# EAGLE board PCB2 (EAGLE 9.5.2)
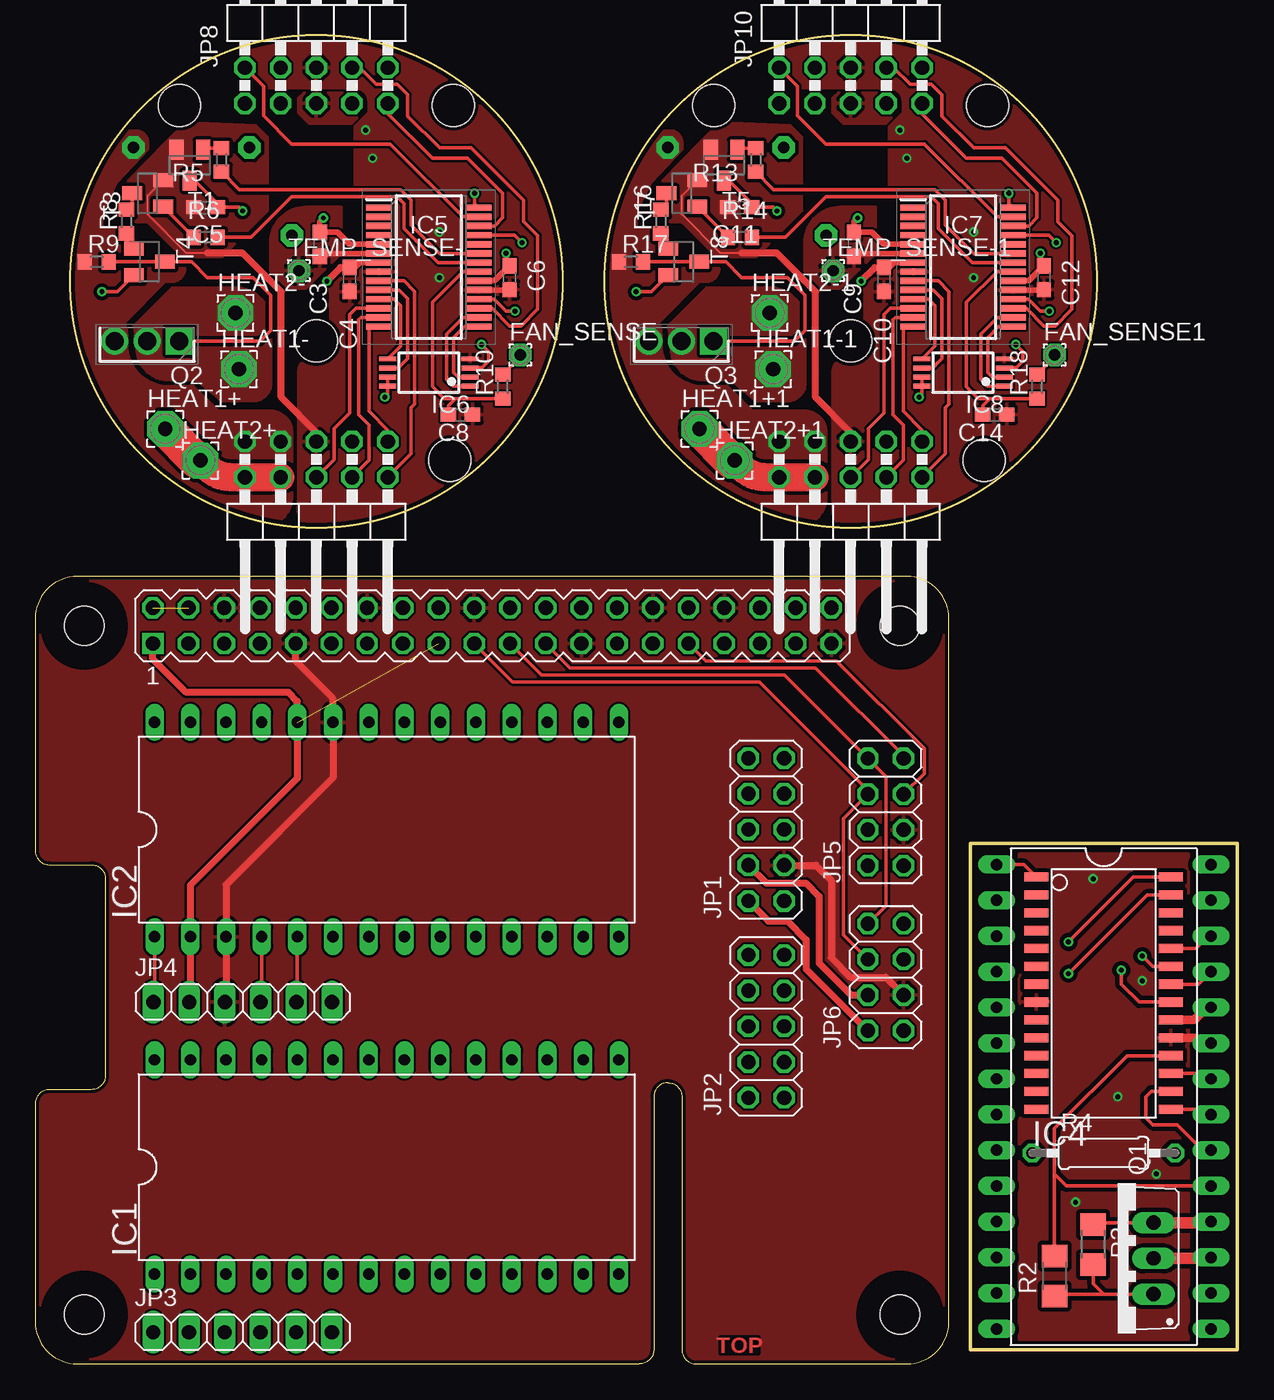
[diagram p0: board, top side]
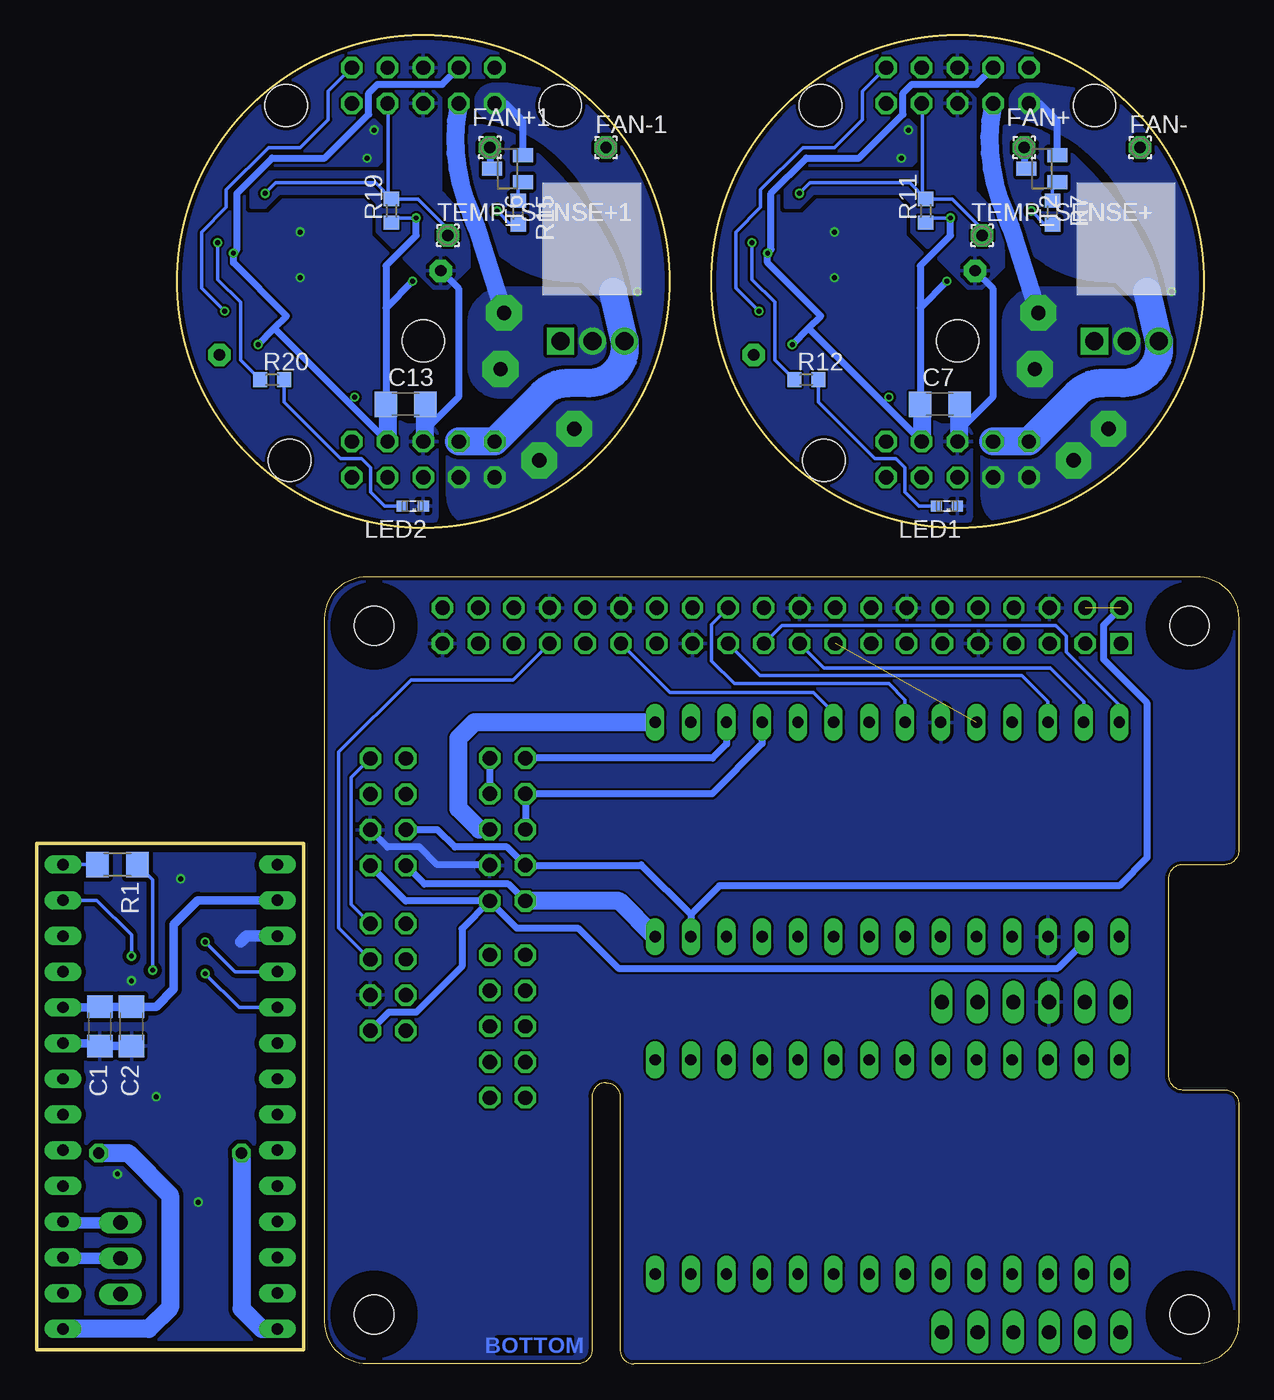
[diagram p1: board, bottom side, seen from below]

Size 85.5 x 94.5 mm. Coordinates in mm from the lower left corner, seen from the top.
Outline: 0,3 arc90 3,0 43,0 arc90 44,1 44,19 arc-90 45,20 arc-90 46,19 46,1 arc90 47,0 62,0 arc90 65,3 65,53 arc90 62,56 3,56 arc90 0,53 0,36.5 arc90 1,35.5 4,35.5 arc-90 5,34.5 5,20.5 arc-90 4,19.5 1,19.5 arc90 0,18.5 0,3
Outline: 85.5,37 66.5,37 66.5,1 85.5,1 85.5,37
Outline: circle at 20,77 radius 17.5
Outline: circle at 58,77 radius 17.5
Copper layers (1*16): Top 0.035mm / dielectric 1.5mm / Bottom 0.035mm
Design rules "ITEADstudio_DRC": minimum track width 6mil, minimum drill 12mil, track to track 6mil, track to pad 6mil, pad to pad 6mil, via to via 6mil, smd to smd 0mil, copper to edge 10mil, drill to drill 10mil, minimum pad ring 10mil, minimum via ring 6mil, stop-mask expansion 2mil, vias tented up to drill 100mil, thermal gap 10mil
Holes 2.8 mm at 3.5,3.5 3.5,52.5 61.5,52.5 61.5,3.5
Holes 3 mm at 20,72.75 10.25,89.5 29.75,89.5 29.5,64.25 58,72.75 48.25,89.5 67.75,89.5 67.5,64.25
tRestrict: area 1.9,51 to 5,54; area 60,51 to 63,54; area 60,1.9 to 63,5; area 1.9,1.9 to 5,5
bRestrict: area 1.9,1.9 to 5,5; area 1.9,51 to 5,54; area 60,1.9 to 63,5; area 60,51 to 63,54

## Footprints (pad centres in the part's own frame; a part is rotated, then mirrored left to right if it is on the bottom)
C1206 = smd 1.6 x 1.8: 1 -1.4,0; 2 1.4,0
C0603 = smd 1.1 x 1: 1 -0.85,0; 2 0.85,0
1,6/0,8 = drill 0.813 pad 1.6 octagon: 1 0,0
2,54/1,0 = drill 1.016 pad 2.54 octagon: 1 0,0
DIL28-6 = drill 0.813 long: 1 -16.51,-7.62; 2 -13.97,-7.62; 3 -11.43,-7.62; 4 -8.89,-7.62; 5 -6.35,-7.62; 6 -3.81,-7.62; 7 -1.27,-7.62; 8 1.27,-7.62; 9 3.81,-7.62; 10 6.35,-7.62; 11 8.89,-7.62; 12 11.43,-7.62; 13 13.97,-7.62; 14 16.51,-7.62; 15 16.51,7.62; 16 13.97,7.62; 17 11.43,7.62; 18 8.89,7.62; 19 6.35,7.62; 20 3.81,7.62; 21 1.27,7.62; 22 -1.27,7.62; 23 -3.81,7.62; 24 -6.35,7.62; 25 -8.89,7.62; 26 -11.43,7.62; 27 -13.97,7.62; 28 -16.51,7.62
SO28W = smd 0.65 x 1.7: 1 -7.62,-4.78; 2 -6.35,-4.78; 3 -5.08,-4.78; 4 -3.81,-4.78; 5 -2.54,-4.78; 6 -1.27,-4.78; 7 0,-4.78; 8 1.27,-4.78; 9 2.54,-4.78; 10 3.81,-4.78; 11 5.08,-4.78; 12 6.35,-4.78; 13 7.62,-4.78; 14 8.89,-4.78; 15 8.89,4.78; 16 7.62,4.78; 17 6.35,4.78; 18 5.08,4.78; 19 3.81,4.78; 20 2.54,4.78; 21 1.27,4.78; 22 0,4.78; 23 -1.27,4.78; 24 -2.54,4.78; 25 -3.81,4.78; 26 -5.08,4.78; 27 -6.35,4.78; 28 -7.62,4.78
SOP65P780X200-28N = smd 1.8 x 0.45: 1 -3.55,4.225; 2 -3.55,3.575; 3 -3.55,2.925; 4 -3.55,2.275; 5 -3.55,1.625; 6 -3.55,0.975; 7 -3.55,0.325; 8 -3.55,-0.325; 9 -3.55,-0.975; 10 -3.55,-1.625; 11 -3.55,-2.275; 12 -3.55,-2.925; 13 -3.55,-3.575; 14 -3.55,-4.225; 15 3.55,-4.225; 16 3.55,-3.575; 17 3.55,-2.925; 18 3.55,-2.275; 19 3.55,-1.625; 20 3.55,-0.975; 21 3.55,-0.325; 22 3.55,0.325; 23 3.55,0.975; 24 3.55,1.625; 25 3.55,2.275; 26 3.55,2.925; 27 3.55,3.575; 28 3.55,4.225
TSSOP8 = smd 0.35 x 1.2: 1 -0.975,-2.925; 2 -0.325,-2.925; 3 0.325,-2.925; 4 0.975,-2.925; 5 0.975,2.925; 6 0.325,2.925; 7 -0.325,2.925; 8 -0.975,2.925
2X05 = drill 1.016 octagon: 1 -5.08,-1.27; 2 -5.08,1.27; 3 -2.54,-1.27; 4 -2.54,1.27; 5 0,-1.27; 6 0,1.27; 7 2.54,-1.27; 8 2.54,1.27; 9 5.08,-1.27; 10 5.08,1.27
1X06 = drill 1.016 long: 1 -6.35,0; 2 -3.81,0; 3 -1.27,0; 4 1.27,0; 5 3.81,0; 6 6.35,0
2X04 = drill 1.016 octagon: 1 -3.81,-1.27; 2 -3.81,1.27; 3 -1.27,-1.27; 4 -1.27,1.27; 5 1.27,-1.27; 6 1.27,1.27; 7 3.81,-1.27; 8 3.81,1.27
2X05/90 = drill 1.016 octagon: 1 -5.08,-6.35; 2 -5.08,-3.81; 3 -2.54,-6.35; 4 -2.54,-3.81; 5 0,-6.35; 6 0,-3.81; 7 2.54,-6.35; 8 2.54,-3.81; 9 5.08,-6.35; 10 5.08,-3.81
PIN_20X2 = drill 1.016 square: 1 -24.13,-1.27 | drill 1.016 octagon: 2 -24.13,1.27; 3 -21.59,-1.27; 4 -21.59,1.27; 5 -19.05,-1.27; 6 -19.05,1.27; 7 -16.51,-1.27; 8 -16.51,1.27; 9 -13.97,-1.27; 10 -13.97,1.27; 11 -11.43,-1.27; 12 -11.43,1.27; 13 -8.89,-1.27; 14 -8.89,1.27; 15 -6.35,-1.27; 16 -6.35,1.27; 17 -3.81,-1.27; 18 -3.81,1.27; 19 -1.27,-1.27; 20 -1.27,1.27; 21 1.27,-1.27; 22 1.27,1.27; 23 3.81,-1.27; 24 3.81,1.27; 25 6.35,-1.27; 26 6.35,1.27; 27 8.89,-1.27; 28 8.89,1.27; 29 11.43,-1.27; 30 11.43,1.27; 31 13.97,-1.27; 32 13.97,1.27; 33 16.51,-1.27; 34 16.51,1.27; 35 19.05,-1.27; 36 19.05,1.27; 37 21.59,-1.27; 38 21.59,1.27; 39 24.13,-1.27; 40 24.13,1.27
SML0603 = smd 0.8 x 0.8: A 0.75,0; C -0.75,0
TO220BV = drill 1.016 long: D 0,-2.54; G -2.54,-2.54; S 2.54,-2.54
TO229P239X654X978-3P = drill 1.28 pad 1.92 square: 1 0,0 | drill 1.28 pad 1.92: 2 2.29,0; 3 4.58,0
R1206 = smd 1.6 x 1.803: 1 -1.422,0; 2 1.422,0
0207/10 = drill 0.813 octagon: 1 -5.08,0; 2 5.08,0
R0603 = smd 1 x 1.1: 1 -0.85,0; 2 0.85,0
SOT23-BEC = smd 1 x 1.4: B -0.95,-1.1; C 0,1.1; E 0.95,-1.1

## Placement (x,y rotation side)
C1  [C1206]  81,24 270 bottom
C2  [C1206]  78.75,24 270 bottom
C3  [C0603]  20.25,79.62 270 top
C4  [C0603]  22.38,77.12 270 top
C5  [C0603]  12.12,82.25 180 top
C6  [C0603]  33.75,77.25 270 top
C7  [C1206]  21.25,68.25 0 bottom
C8  [C0603]  30.25,67.5 180 top
C9  [C0603]  58.25,79.62 270 top
C10  [C0603]  60.38,77.12 270 top
C11  [C0603]  50.12,82.25 180 top
C12  [C0603]  71.75,77.25 270 top
C13  [C1206]  59.25,68.25 0 bottom
C14  [C0603]  68.25,67.5 180 top
FAN+  [1,6/0,8]  15.25,86.5 0 bottom
FAN+1  [1,6/0,8]  53.25,86.5 0 bottom
FAN-  [1,6/0,8]  7,86.5 0 bottom
FAN-1  [1,6/0,8]  45,86.5 0 bottom
FAN_SENSE  [1,6/0,8]  34.5,71.75 0 top
FAN_SENSE1  [1,6/0,8]  72.5,71.75 0 top
HEAT1+  [2,54/1,0]  9.25,66.5 0 top
HEAT1+1  [2,54/1,0]  47.25,66.5 0 top
HEAT1-  [2,54/1,0]  14.5,70.75 0 top
HEAT1-1  [2,54/1,0]  52.5,70.75 0 top
HEAT2+  [2,54/1,0]  11.75,64.25 0 top
HEAT2+1  [2,54/1,0]  49.75,64.25 0 top
HEAT2-  [2,54/1,0]  14.25,74.75 0 top
HEAT2-1  [2,54/1,0]  52.25,74.75 0 top
IC1  [DIL28-6]  25,14 0 top
IC2  [DIL28-6]  25,38 0 top
IC3  [DIL28-6]  76,19 270 top
IC4  PIC16F18857  [SO28W]  76,27 270 top
IC5  DSPIC33CK256MP502-I_SS  [SOP65P780X200-28N]  28,78 0 top
IC6  25AA040ST  [TSSOP8]  28,70.5 90 top
IC7  DSPIC33CK256MP502-I_SS  [SOP65P780X200-28N]  66,78 0 top
IC8  25AA040ST  [TSSOP8]  66,70.5 90 top
JP1  [2X05]  52,38 90 top
JP2  [2X05]  52,24 90 top
JP3  [1X06]  14.75,2.25 0 top
JP4  [1X06]  14.76,25.73 0 top
JP5  [2X04]  60.5,39.25 90 top
JP6  [2X04]  60.5,27.5 90 top
JP7  [2X05/90]  20,59.25 180 top
JP8  [2X05/90]  20,96 0 top
JP9  [2X05/90]  58,59.25 180 top
JP10  [2X05/90]  58,96 0 top
K1  PIN20X2  [PIN_20X2]  32.5,52.5 0 top
LED1  [SML0603]  20.75,61 180 bottom
LED2  [SML0603]  58.75,61 180 bottom
Q1  [TO220BV]  77,7.5 90 top
Q2  AUIRFU8403  [TO229P239X654X978-3P]  10.25,72.75 180 top
Q3  AUIRFU8403  [TO229P239X654X978-3P]  48.25,72.75 180 top
R1  [R1206]  79.75,35.5 0 bottom
R2  [R1206]  72.5,6.25 90 top
R3  [R1206]  75.25,8.5 270 top
R4  [0207/10]  76,15 0 top
R5  [R0603]  13.25,85.62 270 top
R6  [R0603]  12.12,80.12 0 top
R7  [R0603]  13.25,81.88 270 bottom
R8  [R0603]  6.5,81.25 90 top
R9  [R0603]  4.38,78.38 0 top
R10  [R0603]  33.25,69.5 90 top
R11  [R0603]  22.25,82 90 bottom
R12  [R0603]  30.75,70 0 bottom
R13  [R0603]  51.25,85.62 270 top
R14  [R0603]  50.12,80.12 0 top
R15  [R0603]  51.25,81.88 270 bottom
R16  [R0603]  44.5,81.25 90 top
R17  [R0603]  42.38,78.38 0 top
R18  [R0603]  71.25,69.5 90 top
R19  [R0603]  60.25,82 90 bottom
R20  [R0603]  68.75,70 0 bottom
T1  [SOT23-BEC]  11,85.25 180 top
T2  [SOT23-BEC]  14,85 90 bottom
T3  [SOT23-BEC]  8,83.25 90 top
T4  [SOT23-BEC]  8.12,78.38 270 top
T5  [SOT23-BEC]  49,85.25 180 top
T6  [SOT23-BEC]  52,85 90 bottom
T7  [SOT23-BEC]  46,83.25 90 top
T8  [SOT23-BEC]  46.12,78.38 270 top
TEMP_SENSE+  [1,6/0,8]  18.25,80.25 0 bottom
TEMP_SENSE+1  [1,6/0,8]  56.25,80.25 0 bottom
TEMP_SENSE-  [1,6/0,8]  18.75,77.75 0 top
TEMP_SENSE-1  [1,6/0,8]  56.75,77.75 0 top

## Library data of the parts
C1-C14 = rcl; SPICEPREFIX: C
FAN+ FAN+1 FAN- FAN-1 FAN_SENSE FAN_SENSE1 HEAT1+ HEAT1+1 HEAT1- HEAT1-1 HEAT2+ HEAT2+1 HEAT2- HEAT2-1 TEMP_SENSE+ TEMP_SENSE+1 TEMP_SENSE- TEMP_SENSE-1 = wirepad
IC1-IC3 = ic-package
IC4 = microchip; MF: MICROCHIP; MPN: PIC16F870-I/SO; OC_FARNELL: 9760946; OC_NEWARK: 61K3457
IC5 IC7 = dsPIC33CK256MP502-I_SS; DESCRIPTION: Digital Signal Processors & Controllers - DSP, DSC 16 Bit DSC, 256KB Flash, 24KB RAM, 100MHz, 28Pin, 3 OpAmp, 3 Comp, PTG, CAN-FD; HEIGHT: 2mm; MANUFACTURER_NAME: Microchip; MANUFACTURER_PART_NUMBER: dsPIC33CK256MP502-I/SS; RS_PART_NUMBER: 1793987P; RS_PRICE-STOCK: http://uk.rs-online.com/web/p/products/1793987P
IC6 IC8 = microchip; MPN: 25AA040A-I/MS; OC_FARNELL: 1331345; OC_NEWARK: 35M0801
JP1-JP10 = pinhead
K1 = FLYFISH; OC_FARNELL: unknown
LED1 LED2 = led
Q1 = transistor-power
Q2 Q3 = AUIRFU8403; DESCRIPTION: Infineon AUIRFU8403 N-channel MOSFET, 100 A, 127 A, 40 V COOLiRFET, 3-Pin IPAK; HEIGHT: 2.39mm; MANUFACTURER_NAME: Infineon; MANUFACTURER_PART_NUMBER: AUIRFU8403
R1-R20 = rcl; SPICEPREFIX: R
T1-T8 = transistor

## Nets
0V: IC2.18 JP1.6 JP1.8
0V1: FAN-.1 JP7.7 JP7.9 Q2.3 R9.1
0V2: FAN-1.1 JP9.7 JP9.9 Q3.3 R17.1
+3V1: C3.1 C4.1 C6.1 C7.1 IC5.5 IC5.7 IC5.20 IC6.3 IC6.7 IC6.8 JP7.3 JP8.4 R11.1
+3V2: C9.1 C10.1 C12.1 C13.1 IC7.5 IC7.7 IC7.20 IC8.3 IC8.7 IC8.8 JP9.3 JP10.4 R19.1
+3V3: IC2.2 IC2.24 JP1.1 JP4.2 JP5.1 JP6.1 K1.1 K1.17
+5V: IC2.13 JP1.4 JP5.4 JP6.4 K1.2 K1.4
+5V1: IC3.13
+12V: IC2.14 JP1.2 JP5.2 JP6.2
+12V1: IC3.14 R4.1
+12V2: HEAT1+.1 HEAT2+.1 JP7.8 JP7.10 JP8.1 T2.E T4.E
+12V3: HEAT1+1.1 HEAT2+1.1 JP9.8 JP9.10 JP10.1 T6.E T8.E
CE0: IC2.22 K1.24
CE1: K1.26
FAN+: FAN+.1 T2.C
FAN+1: FAN+1.1 T6.C
FAN_SENSE: C8.2 IC5.21 R10.1
FAN_SENSE1: C14.2 IC7.21 R18.1
GND: IC2.3 IC2.23 JP1.3 JP4.3 JP5.3 JP6.3 K1.6 K1.9 K1.14 K1.20 K1.25 K1.30 K1.34 K1.39
GND1: C1.2 C2.2 IC3.3 IC3.23 IC4.8 IC4.19
GND2: C3.2 C4.2 C5.2 C6.2 C7.2 C8.1 IC5.6 IC5.8 IC5.19 IC6.4 JP7.5 JP8.5 JP8.6 LED1.C T1.E T3.E TEMP_SENSE-.1
GND3: C9.2 C10.2 C11.2 C12.2 C13.2 C14.1 IC7.6 IC7.8 IC7.19 IC8.4 JP9.5 JP10.5 JP10.6 LED2.C T5.E T7.E TEMP_SENSE-1.1
GPIO6: JP5.5 K1.31
GPIO13: JP6.5 K1.33
HEAT-: HEAT1-.1 HEAT2-.1 JP8.3 Q2.2
HEAT-1: HEAT1-1.1 HEAT2-1.1 JP10.3 Q3.2
ICSP_MCLR: IC2.1 JP4.1
ICSP_PGC: IC2.5 JP4.5
ICSP_PGD: IC2.4 JP4.4
ISCP_PGD: IC3.4 IC4.28
MCLR: IC5.27 JP8.2
MCLR1: IC7.27 JP10.2
MISO: IC2.28 JP5.8 JP6.8 K1.21
MOSI: IC2.27 JP5.6 JP6.6 K1.19
N$1: IC3.25 IC4.22
N$2: IC4.21 R1.2
N$4: R8.2 T3.C
N$5: R8.1 T4.B
N$6: JP4.6
N$8: IC3.5 IC4.27
N$9: R5.1 T1.B
N$10: C5.1 R7.2 T1.C
N$11: R7.1 T2.B
N$12: Q1.G R2.1 R3.2
N$13: R6.1 T3.B
N$14: IC3.21 IC4.15
N$15: Q2.1 R9.2 T4.C
N$16: FAN_SENSE.1 R10.2
N$17: IC5.11 IC6.5
N$18: IC5.10 IC6.6
N$19: IC5.15 IC6.2
N$20: IC5.16 IC6.1
N$21: IC5.22 R6.2
N$22: IC5.23 R5.2
N$23: LED1.A R12.2
N$24: IC5.25 R12.1
N$25: R13.1 T5.B
N$26: R15.1 T6.B
N$27: C11.1 R15.2 T5.C
N$28: R16.2 T7.C
N$29: R16.1 T8.B
N$30: R14.1 T7.B
N$31: Q3.1 R17.2 T8.C
N$32: FAN_SENSE1.1 R18.2
N$33: IC7.11 IC8.5
N$34: IC7.10 IC8.6
N$35: IC7.15 IC8.2
N$36: IC7.16 IC8.1
N$37: IC7.22 R14.2
N$38: IC7.23 R13.2
N$39: LED2.A R20.2
N$40: IC7.25 R20.1
PGC: IC5.18 JP8.10
PGC1: IC7.18 JP10.10
PGD: IC5.17 JP8.8
PGD1: IC7.17 JP10.8
SCLK: IC2.26 JP5.7 JP6.7 K1.23
SPI1: IC5.9 JP7.2
SPI2: IC5.12 JP7.6
SPI3: IC5.13 JP7.4
SPI4: IC5.14 JP7.1
SPI5: IC7.9 JP9.2
SPI6: IC7.12 JP9.6
SPI7: IC7.13 JP9.4
SPI8: IC7.14 JP9.1
SPI_CLOCK: IC3.26 IC4.24
SPI_IN: IC3.27 IC4.23
SPI_MCLR: IC3.1 IC4.1
SPI_OUT: IC3.28 R1.1
SPI_SS: IC3.22 IC4.17
STROBE+: JP1.7 JP1.9
STROBE+_RES: IC2.15 JP1.5
STROBE+_RES1: IC3.15 R4.2
STROBE-: IC2.17 JP1.10
STROBE-1: IC3.17 Q1.D
STROBE_0V: IC3.18 Q1.S R3.1
STROBE_GATE: IC2.19
STROBE_GATE1: IC3.19 IC4.18 R2.2
STROBE_TRIG_IN: IC2.20 K1.29
STROBE_TRIG_IN1: IC3.20 IC4.16
TEMP_SENSE: IC5.28 JP8.7 R11.2 TEMP_SENSE+.1
TEMP_SENSE1: IC7.28 JP10.7 R19.2 TEMP_SENSE+1.1
TX: IC5.26 JP8.9
TX1: IC7.26 JP10.9
V+: C1.1 C2.1 IC3.2 IC3.24 IC4.20

## Tracks (layer width: path | path; a pad name or v marks a point on that pad's centre or on a via)
0V
  Bottom 0.508: IC2.18 33.89,44.11 37.46,40.54 JP1.8 JP1.6
0V1
  Bottom 2: JP7.7 JP7.9 11.51,69.01 arc45 9.72,69.75 8.21,69.75 arc-90 5.67,72.29 Q2.3 6.5,76.25
  pour Top (isolate 0.254, no thermals): 6.5,72.5 6.5,73.25 arc90 5,74.75 arc90 2.88,72.62 arc90 16,59.5 arc90 18.25,61.75 18.25,66.25 arc90 16.75,67.75 13,67.75 11.25,69.5 9.5,69.5 arc-90
  pour Top (isolate 0.254, no thermals): 6.52,72.02 6.32,74.07 9.25,77 9.75,77 arc90 10.62,77.88 7.75,80.75 4.75,80.75 4.75,82 5.75,84 8,86.38 8,86.88 arc90 7.19,87.69 arc90 2,82.5 2,73.25 2.75,71.75 6.25,71.75
  pour Bottom (isolate 0.254): 17.06,87.94 arc-90 17.75,87.25 17.75,85.5 arc-90 9.25,77 8.75,77 6.25,74.5 5.5,74.5 arc-26 6.58,79.1 arc-25 13,87 arc-51
0V2
  Bottom 2: JP9.7 JP9.9 49.51,69.01 arc45 47.72,69.75 46.21,69.75 arc-90 43.67,72.29 Q3.3 44.5,76.25
  pour Top (isolate 0.254, no thermals): 44.5,72.5 44.5,73.25 arc90 43,74.75 arc90 40.88,72.62 arc90 54,59.5 arc90 56.25,61.75 56.25,66.25 arc90 54.75,67.75 51,67.75 49.25,69.5 47.5,69.5 arc-90
  pour Top (isolate 0.254, no thermals): 44.52,72.02 44.32,74.07 47.25,77 47.75,77 arc90 48.62,77.88 45.75,80.75 42.75,80.75 42.75,82 43.75,84 46,86.38 46,86.88 arc90 45.19,87.69 arc90 40,82.5 40,73.25 40.75,71.75 44.25,71.75
  pour Bottom (isolate 0.254): 55.06,87.94 arc-90 55.75,87.25 55.75,85.5 arc-90 47.25,77 46.75,77 44.25,74.5 43.5,74.5 arc-26 44.58,79.1 arc-25 51,87 arc-51
+3V1  (via drill 0.35)
  Top 0.254: IC6.7 IC6.8 25.07,68.95 v24.88,68.75 | 31.75,70.83 32.25,71.33 32.25,72 v31.75,72.5
  Top 0.305: IC6.3 31.75,70.83
  Top 0.406: IC5.7 23.07,78.33 22.73,77.97 C4.1 21.73,77.97 | IC5.5 22.38,79.62 21.5,80.5 20.27,80.5 C3.1 20.25,81.25 v20.5,81.5 | v33.5,79 33.5,78.35 C6.1 32.67,77.03 IC5.20
  Top 0.508: 21.73,77.97 v20.75,77
  Bottom 0.254: v24.88,68.75 25.22,68.41 25.34,68.41 | v20.5,81.5 21.9,81.5 R11.1
  Bottom 0.508: JP7.3 25.34,68.41 30.59,73.66 | v31.75,72.5 30.59,73.66 | 30.59,73.66 29.72,74.53 33.5,78.31 v33.5,79 33.25,79.25 33.25,83.25 30.75,85.75 27,85.75 23.88,88.88 23.88,90.38 23.25,91 18.65,91 JP8.4 | v20.75,77 22.65,75.1 | 22.65,75.1 22.65,78.1 20.5,80.25 v20.5,81.5 | 22.65,75.1 C7.1 22.54,68.14
  Bottom 1.27: 22.54,68.14 JP7.3
+3V2  (via drill 0.35)
  Top 0.254: IC8.7 IC8.8 63.08,68.95 v62.88,68.75 | 69.75,70.83 70.25,71.33 70.25,72 v69.75,72.5
  Top 0.305: IC8.3 69.75,70.83
  Top 0.406: IC7.7 61.08,78.33 60.73,77.97 C10.1 59.73,77.97 | IC7.5 60.38,79.62 59.5,80.5 58.27,80.5 C9.1 58.25,81.25 v58.5,81.5 | v71.5,79 71.5,78.35 C12.1 70.67,77.03 IC7.20
  Top 0.508: 59.73,77.97 v58.75,77
  Bottom 0.254: v62.88,68.75 63.22,68.41 63.34,68.41 | v58.5,81.5 59.9,81.5 R19.1
  Bottom 0.508: JP9.3 63.34,68.41 68.59,73.66 | v69.75,72.5 68.59,73.66 | 68.59,73.66 67.72,74.53 71.5,78.31 v71.5,79 71.25,79.25 71.25,83.25 68.75,85.75 65,85.75 61.88,88.88 61.88,90.38 61.25,91 56.65,91 JP10.4 | v58.75,77 60.65,75.1 | 60.65,75.1 60.65,78.1 58.5,80.25 v58.5,81.5 | 60.65,75.1 C13.1 60.54,68.14
  Bottom 1.27: 60.54,68.14 JP9.3
+3V3  (1 unrouted)
  Top 0.508: K1.1 8.37,50.13 10.75,47.75 18.02,47.75 18.65,47.12 IC2.24 18.65,41.65 11.03,34.03 IC2.2 11.03,25.82 JP4.2
  Bottom 0.508: JP1.1 51.35,31 47,31 44.12,28.12 12.88,28.12 11.03,29.97 IC2.2 | JP1.1 59.25,32.92 JP5.1 | JP1.1 55.25,30.94 55.25,28.25 58.5,25 60.46,25 JP6.1
+5V  (1 unrouted)
  Top 0.508: JP1.4 52,34.19 54.81,34.19 55.75,33.25 55.75,28.5 58.02,26.23 JP6.4
  Bottom 0.508: K1.2 9.62,52.52 9.62,50.12 6.5,47 6.5,36 8.5,34 36.94,34 38.97,31.97 | 38.97,31.97 IC2.13 | 38.97,31.97 42.5,35.5 42.54,35.46 JP1.4 52.02,36.75 55.75,36.75 56.98,37.98 JP5.4
+12V
  Top 0.508: JP1.2 52.15,31.5 53.5,31.5 54.84,30.16 54.84,28.08 JP6.2
  Bottom 0.508: JP1.2 51.94,34.12 57.91,34.12 JP5.2
  Bottom 1.27: IC2.14 44.05,32.92 JP1.2
+12V1
  Bottom 1.27: R4.1 70.92,3.92 69.49,2.49 IC3.14
+12V2  (via drill 0.35)
  Top 0.254: T4.E 5.85,76.25 v4.75,76.25
  Top 2: HEAT2+.1 12.2,63.8 arc45 13.99,63.06 JP7.10 JP7.8
  Top 2.54: HEAT1+.1 11.5,64.25 HEAT2+.1
  Bottom 0.508: T2.E 12.9,88.4 14.15,89.65 JP8.1
  pour Bottom (isolate 0.254, no thermals): 18.25,61.75 18.25,65 arc90 15.25,68 6.75,68 arc90 5.5,66.75 arc90 12.75,59.5 16,59.5 arc90
  pour Bottom (isolate 0.254, no thermals): 6.25,65 arc-90 1.5,69.75 1.5,84.5 arc-90 7,90 14,91 15,91 arc-90 16.25,89.75 arc-90 15,88.5 arc47 8.02,82.82 arc39 4.8,73.7 arc90 10,68.5 arc-90 11.5,67 arc-90 9.5,65
+12V3  (via drill 0.35)
  Top 0.254: T8.E 43.85,76.25 v42.75,76.25
  Top 2: HEAT2+1.1 50.2,63.8 arc45 51.99,63.06 JP9.10 JP9.8
  Top 2.54: HEAT1+1.1 49.5,64.25 HEAT2+1.1
  Bottom 0.508: T6.E 50.9,88.4 52.15,89.65 JP10.1
  pour Bottom (isolate 0.254, no thermals): 56.25,61.75 56.25,65 arc90 53.25,68 44.75,68 arc90 43.5,66.75 arc90 50.75,59.5 54,59.5 arc90
  pour Bottom (isolate 0.254, no thermals): 44.25,65 arc-90 39.5,69.75 39.5,84.5 arc-90 45,90 52,91 53,91 arc-90 54.25,89.75 arc-90 53,88.5 arc47 46.02,82.82 arc39 42.8,73.7 arc90 48,68.5 arc-90 49.5,67 arc-90 47.5,65
CE0
  Bottom 0.254: IC2.22 23.73,47.23 24.88,48.38 35.88,48.38 37.5,50 37.5,52.58 K1.24
FAN+
  Bottom 0.508: T2.C 15.25,85.15 FAN+.1
FAN+1
  Bottom 0.508: T6.C 53.25,85.15 FAN+1.1
FAN_SENSE
  Top 0.254: R10.1 29.9,68.65 | C8.2 29.4,68.15 29.9,68.65 | 29.9,68.65 29.1,68.65 28.25,69.5 28.25,75.5 30.43,77.67 IC5.21
FAN_SENSE1
  Top 0.254: R18.1 67.9,68.65 | C14.2 67.4,68.15 67.9,68.65 | 67.9,68.65 67.1,68.65 66.25,69.5 66.25,75.5 68.42,77.67 IC7.21
GND
  Top 0.508: K1.9 18.53,49.97 21.19,47.31 IC2.23 21.19,41.69 13.57,34.07 IC2.3 13.57,25.82 JP4.3 | JP1.3 55.54,35.46 56.62,34.38 56.62,28.88 58,27.5 60.5,27.5 JP6.3
  Bottom 0.508: JP1.3 53.31,35.5 57,35.5 58.25,36.75 60.54,36.75 JP5.3
  pour Bottom: 0,3 arc90 3,0 43,0 arc90 44,1 44,19 arc-90 45,20 arc-90 46,19 46,1 arc90 47,0 62,0 arc90 65,3 65,53 arc90 62,56 3,56 arc90 0,53 0,36.5 arc90 1,35.5 4,35.5 arc-90 5,34.5 5,20.5 arc-90 4,19.5 1,19.5 arc90 0,18.5
  pour Top: 0,3 arc90 3,0 43,0 arc90 44,1 44,19 arc-90 45,20 arc-90 46,19 46,1 arc90 47,0 62,0 arc90 65,3 65,53 arc90 62,56 3,56 arc90 0,53 0,36.5 arc90 1,35.5 4,35.5 arc-90 5,34.5 5,20.5 arc-90 4,19.5 1,19.5 arc90 0,18.5
GND1  (via drill 0.35)
  Top 0.61: IC3.23 83.56,22.75 83,22.75 82.56,23.19 IC4.19
  Bottom 0.61: IC3.23 81.21,22.81 C1.2 C2.2
  Bottom 0.813: IC3.3 70.57,30.43 71,30
  other vias: 75.25,34.5 78.75,27.25 77,19 79.75,13.5 74,11.5
  pour Top (isolate 0.305): 82,36.25 70,36.25 70,1.75 82,1.75
  pour Bottom (isolate 0.305): 82,36.25 70,36.25 70,1.75 82,1.75
GND2  (via drill 0.35)
  Top 0.152: 12.25,79 10.75,79 8,81.75 8,83.1 T3.E
  Top 0.406: IC5.6 20.45,78.97 C3.2 | IC5.19 33.73,76.38 C6.2
  Top 0.508: JP7.5 20,66.25 17.5,68.75 17.5,76.25 14.75,79 12.25,79
  Bottom 0.508: TEMP_SENSE-.1 17.5,76.5 17.5,68.75 20,66.25 JP7.5
  Bottom 1.27: JP7.5 19.85,65.75 C7.2
  other vias: 28.75,77.25 28.75,80.5 24,85.75 23.5,87.75
  pour Top (isolate 0.254, no thermals): 10.25,79 8,81.25 5.5,81.25 arc-44 6.67,84.17 arc-3 10.76,88.26 15.69,88.06 16.5,87.25 16.5,82 13.25,78.75 10.45,78.75
  pour Bottom: 23.25,80.5 19.25,76.5 18.25,76.5 16.75,78 16.75,79 arc-90 22.5,84.75 31,84.75 32.25,83.5 32.25,82.25 31.25,82.25 30.25,83.25 24,83.25 23.25,82.5
  pour Top: 21.75,79 19.25,76.5 18,76.5 16.75,77.75 16.75,79.75 arc-90 19.25,82.25 21.75,82.25
  pour Top: 33.25,64.5 36.34,67.59 arc116 17.4,96.39 14.59,94.12 arc74 13.21,92.29 arc90 14.75,90.75 22.75,90.75 arc-90 23.75,89.75 23.75,89 22.75,88 22.75,80.5 23,80.25 25,80.25 arc-90 25.75,79.5 25.75,79 arc-90 25,78.25 22.75,78.25 arc90 21,76.5 21,72.75 arc-90 20,71.75 arc90 18.75,70.5 18.75,60.75 arc90 20.25,59.25 arc44
  pour Bottom: 33.25,64.5 36.34,67.59 arc116 17.4,96.39 14.59,94.12 arc74 13.21,92.29 arc90 14,91.5 22.25,91.5 arc-90 24.25,89.5 23.75,88.75 23,88 23,85.5 23.25,85.25 31.25,85.25 32.75,83.75 32.75,82 32.5,81.75 31,81.75 30,82.75 24.25,82.75 23.75,82.25 23.75,80.25 22.25,78.75 22.25,78.5 arc64 21,76.5 21,76 arc90 22,75 arc-90 22.5,74.5 22.5,68.5 arc-90 20.75,66.75 19.75,66.75 arc90 19,66 19,60.5 arc90 20.25,59.25 arc44
  pour Bottom: 22.75,90.5 19.25,90.5 18.75,90 18.75,83 19,82.75 22,84 22.25,84.25 22.5,85.5 22.5,88.25 23.25,89 23.25,90
  pour Top: 22.88,90.38 19.12,90.38 18.75,90 18.75,89 19.5,88.25 22.5,88.25 23.25,89 23.25,90
GND3  (via drill 0.35)
  Top 0.152: 50.25,79 48.75,79 46,81.75 46,83.1 T7.E
  Top 0.406: IC7.6 58.45,78.97 C9.2 | IC7.19 71.72,76.38 C12.2
  Top 0.508: JP9.5 58,66.25 55.5,68.75 55.5,76.25 52.75,79 50.25,79
  Bottom 0.508: TEMP_SENSE-1.1 55.5,76.5 55.5,68.75 58,66.25 JP9.5
  Bottom 1.27: JP9.5 57.85,65.75 C13.2
  other vias: 66.75,77.25 66.75,80.5 62,85.75 61.5,87.75
  pour Top (isolate 0.254, no thermals): 48.25,79 46,81.25 43.5,81.25 arc-44 44.67,84.17 arc-3 48.76,88.26 53.69,88.06 54.5,87.25 54.5,82 51.25,78.75 48.45,78.75
  pour Bottom: 61.25,80.5 57.25,76.5 56.25,76.5 54.75,78 54.75,79 arc-90 60.5,84.75 69,84.75 70.25,83.5 70.25,82.25 69.25,82.25 68.25,83.25 62,83.25 61.25,82.5
  pour Top: 59.75,79 57.25,76.5 56,76.5 54.75,77.75 54.75,79.75 arc-90 57.25,82.25 59.75,82.25
  pour Top: 71.25,64.5 74.34,67.59 arc116 55.4,96.39 52.59,94.12 arc74 51.21,92.29 arc90 52.75,90.75 60.75,90.75 arc-90 61.75,89.75 61.75,89 60.75,88 60.75,80.5 61,80.25 63,80.25 arc-90 63.75,79.5 63.75,79 arc-90 63,78.25 60.75,78.25 arc90 59,76.5 59,72.75 arc-90 58,71.75 arc90 56.75,70.5 56.75,60.75 arc90 58.25,59.25 arc44
  pour Bottom: 71.25,64.5 74.34,67.59 arc116 55.4,96.39 52.59,94.12 arc74 51.21,92.29 arc90 52,91.5 60.25,91.5 arc-90 62.25,89.5 61.75,88.75 61,88 61,85.5 61.25,85.25 69.25,85.25 70.75,83.75 70.75,82 70.5,81.75 69,81.75 68,82.75 62.25,82.75 61.75,82.25 61.75,80.25 60.25,78.75 60.25,78.5 arc64 59,76.5 59,76 arc90 60,75 arc-90 60.5,74.5 60.5,68.5 arc-90 58.75,66.75 57.75,66.75 arc90 57,66 57,60.5 arc90 58.25,59.25 arc44
  pour Bottom: 60.75,90.5 57.25,90.5 56.75,90 56.75,83 57,82.75 60,84 60.25,84.25 60.5,85.5 60.5,88.25 61.25,89 61.25,90
  pour Top: 60.88,90.38 57.12,90.38 56.75,90 56.75,89 57.5,88.25 60.5,88.25 61.25,89 61.25,90
GPIO6
  Top 0.254: K1.31 47.7,50 57,50 63.25,43.75 63.25,42 JP5.5
GPIO13
  Bottom 0.254: K1.33 51.62,48.62 58.88,48.62 64,43.5 64,31 JP6.5
HEAT-
  Bottom 0.254: JP8.3 17.5,89.61 17.5,89.5
  Bottom 1.27: HEAT2-.1 16,80.25 arc-7 16.59,81.79 arc35 17.5,89.5
  pour Bottom (isolate 0.254, no thermals): 16.75,71 16.75,74 arc90 14.25,76.5 9,76.5 6.5,74 arc90 11.75,68.75 14.5,68.75 arc90
  pour Top (isolate 0.254, no thermals): 16.75,69.75 16.75,74 arc90 14.25,76.5 9.75,76.5 7.08,73.83 7.25,72.25 arc90 9.5,70 11.5,70 13.25,68.5 15.5,68.5 arc90
HEAT-1
  Bottom 0.254: JP10.3 55.5,89.61 55.5,89.5
  Bottom 1.27: HEAT2-1.1 54,80.25 arc-7 54.59,81.79 arc35 55.5,89.5
  pour Bottom (isolate 0.254, no thermals): 54.75,71 54.75,74 arc90 52.25,76.5 47,76.5 44.5,74 arc90 49.75,68.75 52.5,68.75 arc90
  pour Top (isolate 0.254, no thermals): 54.75,69.75 54.75,74 arc90 52.25,76.5 47.75,76.5 45.08,73.83 45.25,72.25 arc90 47.5,70 49.5,70 51.25,68.5 53.5,68.5 arc90
ICSP_MCLR
  Top 0.254: IC2.1 8.49,25.82 JP4.1
ICSP_PGC
  Top 0.254: IC2.5 18.65,25.82 JP4.5
ICSP_PGD
  Top 0.254: IC2.4 16.11,25.82 JP4.4
ISCP_PGD  (via drill 0.35)
  Top 0.254: IC4.28 78.12,34.62 v73.5,30
  Bottom 0.254: v73.5,30 71.39,27.89 IC3.4
MCLR
  Top 0.254: JP8.2 16.23,90.88 16.23,88.77 18.25,86.75 20.5,86.75 25.25,86.75 30.43,81.58 IC5.27
MCLR1
  Top 0.254: JP10.2 54.23,90.88 54.23,88.77 56.25,86.75 58.5,86.75 63.25,86.75 68.42,81.58 IC7.27
MISO
  Top 0.254: K1.21 36,49 53.29,49 JP5.8 60.5,41.79 60.5,32.58 JP6.8
  Bottom 0.254: IC2.28 8.49,46.87 12.25,50.63 12.25,51.75 13,52.5 32.5,52.5 K1.21
MOSI
  Top 0.254: K1.19 33.96,48.5 51.5,48.5 59.23,40.77 JP5.6 57.5,38.79 57.5,30.5 JP6.6
  Bottom 0.254: IC2.27 11.03,47.12 13.41,49.5 29.5,49.5 K1.19
N$1
  Top 0.254: IC4.22 82.73,27 IC3.25
N$2  (via drill 0.35)
  Top 0.254: IC4.21 78.52,25.73 77.25,27 v77.25,28
  Bottom 0.254: v77.25,28 77.25,34.42 R1.2
N$4
  Top 0.254: R8.2 6.9,82.5 T3.C
N$5
  Top 0.254: T4.B 6.5,79.85 R8.1
N$8  (via drill 0.35)
  Top 0.254: IC4.27 79.1,33.35 v73.5,27.75
  Bottom 0.254: v73.5,27.75 71.1,25.35 IC3.5
N$9
  Top 0.254: T1.B 12.07,86.47 R5.1
N$10  (via drill 0.35)
  Top 0.254: T1.C 11.35,84.15 12.75,82.75 12.75,82.47 C5.1 14.5,82.25 v14.75,82
  Bottom 0.254: R7.2 13.78,81.03 v14.75,82
N$11
  Bottom 0.254: R7.1 13.27,83.66 T2.B
N$12
  Top 0.254: R2.1 72.63,4.96 76,4.96 | 76,4.96 Q1.G | R3.2 75.25,5.71 76,4.96
N$13
  Top 0.254: R6.1 T3.B
N$14
  Top 0.254: IC4.15 83.24,18.11 IC3.21
N$15
  Top 0.254: R9.2 T4.C 11.12,78.38 12.25,77.25 15.5,77.25 16.75,76 16.75,73.5 16,72.75 Q2.1
N$16
  Top 0.254: FAN_SENSE.1 34.5,71.6 R10.2
N$17
  Top 0.254: IC6.5 26,72.4 26,75.25 25.52,75.72 IC5.11
N$18
  Top 0.254: IC6.6 25.82,70.83 26.5,71.5 26.5,75.75 25.88,76.38 IC5.10
N$19
  Top 0.254: IC6.2 30.07,70.17 29.75,70.5 29.75,73 30.52,73.78 IC5.15
N$20
  Top 0.254: IC6.1 29.73,69.53 29.25,70 29.25,73.25 30.43,74.42 IC5.16
N$21
  Top 0.254: R6.2 15.38,80.12 18.25,83 25.75,83 26.25,82.5 26.25,80.75 28.68,78.33 IC5.22
N$22
  Top 0.254: R5.2 14.53,83.5 19.5,83.5 26,83.5 26.75,82.75 26.75,81 28.77,78.97 IC5.23
N$23
  Bottom 0.254: LED1.A 22.75,61 23.75,62 23.75,63.75 24.38,64.38 25.88,64.38 29.9,68.4 R12.2
N$24  (via drill 0.35)
  Top 0.254: v34.62,79.75 34.1,80.28 IC5.25
  Bottom 0.254: R12.1 33,71.4 33,75.5 34.62,77.12 v34.62,79.75
N$25
  Top 0.254: T5.B 50.08,86.47 R13.1
N$26
  Bottom 0.254: R15.1 51.27,83.66 T6.B
N$27  (via drill 0.35)
  Top 0.254: T5.C 49.35,84.15 50.75,82.75 50.75,82.47 C11.1 52.5,82.25 v52.75,82
  Bottom 0.254: R15.2 51.77,81.03 v52.75,82
N$28
  Top 0.254: R16.2 44.9,82.5 T7.C
N$29
  Top 0.254: T8.B 44.5,79.85 R16.1
N$30
  Top 0.254: R14.1 T7.B
N$31
  Top 0.254: R17.2 T8.C 49.12,78.38 50.25,77.25 53.5,77.25 54.75,76 54.75,73.5 54,72.75 Q3.1
N$32
  Top 0.254: FAN_SENSE1.1 72.5,71.6 R18.2
N$33
  Top 0.254: IC8.5 64,72.4 64,75.25 63.52,75.72 IC7.11
N$34
  Top 0.254: IC8.6 63.83,70.83 64.5,71.5 64.5,75.75 63.88,76.38 IC7.10
N$35
  Top 0.254: IC8.2 68.08,70.17 67.75,70.5 67.75,73 68.53,73.78 IC7.15
N$36
  Top 0.254: IC8.1 67.72,69.53 67.25,70 67.25,73.25 68.42,74.42 IC7.16
N$37
  Top 0.254: R14.2 53.38,80.12 56.25,83 63.75,83 64.25,82.5 64.25,80.75 66.67,78.33 IC7.22
N$38
  Top 0.254: R13.2 52.52,83.5 57.5,83.5 64,83.5 64.75,82.75 64.75,81 66.78,78.97 IC7.23
N$39
  Bottom 0.254: LED2.A 60.75,61 61.75,62 61.75,63.75 62.38,64.38 63.88,64.38 67.9,68.4 R20.2
N$40  (via drill 0.35)
  Top 0.254: v72.62,79.75 72.1,80.28 IC7.25
  Bottom 0.254: R20.1 71,71.4 71,75.5 72.62,77.12 v72.62,79.75
PGC  (via drill 0.35)
  Top 0.254: IC5.18 32.65,75.72 33.5,74.88 v34.12,74.88
  Bottom 0.254: v34.12,74.88 35.75,76.5 35.75,80.5 34,82.25 34,83.5 31,86.5 28.75,86.5 26.75,88.5 26.75,90.52 JP8.10
PGC1  (via drill 0.35)
  Top 0.254: IC7.18 70.65,75.72 71.5,74.88 v72.12,74.88
  Bottom 0.254: v72.12,74.88 73.75,76.5 73.75,80.5 72,82.25 72,83.5 69,86.5 66.75,86.5 64.75,88.5 64.75,90.52 JP10.10
PGD
  Top 0.254: JP8.8 23.06,92.19 24.25,91 25.75,91 26.5,90.25 26.5,88.75 28.75,86.5 31,86.5 34.75,82.75 34.75,81.25 35.75,80.25 35.75,75 34.57,73.82 33.76,73.82 32.51,75.08 IC5.17
PGD1
  Top 0.254: JP10.8 61.06,92.19 62.25,91 63.75,91 64.5,90.25 64.5,88.75 66.75,86.5 69,86.5 72.75,82.75 72.75,81.25 73.75,80.25 73.75,75 72.57,73.82 71.76,73.82 70.5,75.08 IC7.17
SCLK
  Top 0.254: K1.23 38.04,49.5 55.5,49.5 61.85,43.15 JP5.7
  Bottom 0.254: IC2.26 13.57,47.12 15.42,48.97 34.05,48.97 K1.23 | JP6.7 63.12,32.66 63.12,41.7 JP5.7
SPI1
  Top 0.254: IC5.9 26.23,77.03 27,76.25 27,68.25 26.75,68 26.75,64.73 JP7.2
SPI2
  Top 0.254: JP7.6 21.25,64.31 21.25,66.5 22.38,67.62 22.38,74.62 22.82,75.08 IC5.12
SPI3
  Top 0.254: JP7.4 23.75,64.27 23.75,66.75 23,67.5 23,74.25 23.18,74.42 IC5.13
SPI4
  Top 0.254: JP7.1 25.08,66.42 23.75,67.75 23.75,73.75 23.77,73.78 IC5.14
SPI5
  Top 0.254: IC7.9 64.22,77.03 65,76.25 65,68.25 64.75,68 64.75,64.73 JP9.2
SPI6
  Top 0.254: JP9.6 59.25,64.31 59.25,66.5 60.38,67.62 60.38,74.62 60.83,75.08 IC7.12
SPI7
  Top 0.254: JP9.4 61.75,64.27 61.75,66.75 61,67.5 61,74.25 61.17,74.42 IC7.13
SPI8
  Top 0.254: JP9.1 63.08,66.42 61.75,67.75 61.75,73.75 61.77,73.78 IC7.14
SPI_CLOCK
  Top 0.254: IC4.24 82.54,29.54 83.43,30.43 IC3.26
SPI_IN  (via drill 0.35)
  Top 0.254: IC4.23 79.48,28.27 v78.75,29
  Bottom 0.254: v78.75,29 78.75,30.5 81.22,32.97 IC3.27
SPI_MCLR
  Top 0.254: IC4.1 70.33,35.51 IC3.1
SPI_OUT
  Bottom 0.254: IC3.28 81.18,35.51 R1.1
SPI_SS
  Top 0.254: IC4.17 83.24,20.65 IC3.22
STROBE+
  Bottom 0.508: JP1.9 JP1.7
STROBE+_RES
  Bottom 1.27: IC2.15 54.38,45.62 55.5,44.5 55.5,39.5 54,38 JP1.5
STROBE+_RES1
  Bottom 1.27: R4.2 79,15 76,12 76,4 77.51,2.49 IC3.15
STROBE-
  Bottom 0.508: IC2.17 36.43,44.07 37.42,43.08 JP1.10
STROBE-1
  Top 0.813: Q1.D 83.55,7.5 IC3.17
  Bottom 0.813: Q1.D 83.55,7.5 IC3.17
STROBE_0V
  Top 0.254: R3.1 75.37,10.04 Q1.S
  Top 0.813: Q1.S 83.55,10.04 IC3.18
  Bottom 0.813: Q1.S 83.55,10.04 IC3.18
STROBE_GATE1
  Top 0.254: IC4.18 77.67,21.92 72.5,16.75 72.5,13.5 | 72.5,13.5 R2.2 | IC3.19 73.35,12.65 72.5,13.5
STROBE_TRIG_IN
  Bottom 0.254: K1.29 40.45,47.75 30.25,47.75 28.81,46.31 IC2.20
STROBE_TRIG_IN1
  Top 0.254: IC4.16 79.38,19.38 79,19 79,17.5 79.5,17 81.25,17 83.06,15.19 IC3.20
TEMP_SENSE  (via drill 0.35)
  Top 0.254: v31.25,83.25 31.25,82.53 IC5.28
  Bottom 0.254: R11.2 20.35,82.85 18.25,80.75 TEMP_SENSE+.1 | R11.2 23.4,84 30.5,84 v31.25,83.25 | R11.2 22.5,83.1 22.5,89.61 JP8.7
TEMP_SENSE1  (via drill 0.35)
  Top 0.254: v69.25,83.25 69.25,82.53 IC7.28
  Bottom 0.254: R19.2 58.35,82.85 56.25,80.75 TEMP_SENSE+1.1 | R19.2 61.4,84 68.5,84 v69.25,83.25 | R19.2 60.5,83.1 60.5,89.61 JP10.7
TX
  Top 0.254: JP8.9 25.08,88.92 28.25,85.75 30.75,85.75 33.25,83.25 33.25,81.5 32.67,80.92 IC5.26
TX1
  Top 0.254: JP10.9 63.08,88.92 66.25,85.75 68.75,85.75 71.25,83.25 71.25,81.5 70.67,80.92 IC7.26
V+
  Top 0.61: IC4.20 82.46,24.46 83.35,25.35 IC3.24
  Bottom 0.61: IC3.24 81.05,25.35 C1.1 C2.1 77,25.4 75.75,26.65 75.75,31.25 74.03,32.97 IC3.2

## Text on the board
Top: TOP
Bottom: BOTTOM